# Altium PCB WTDP.PcbDoc
Units mm, origin at the board's own origin, x right, y up, seen from the top; angles counter-clockwise.
Board outline 59 x 42.55 mm, 2 copper layers (Top Layer, Bottom Layer); 37 components, 37 nets, 129 pads, 38 vias.
Unrouted connection lines stored in the file: 2.
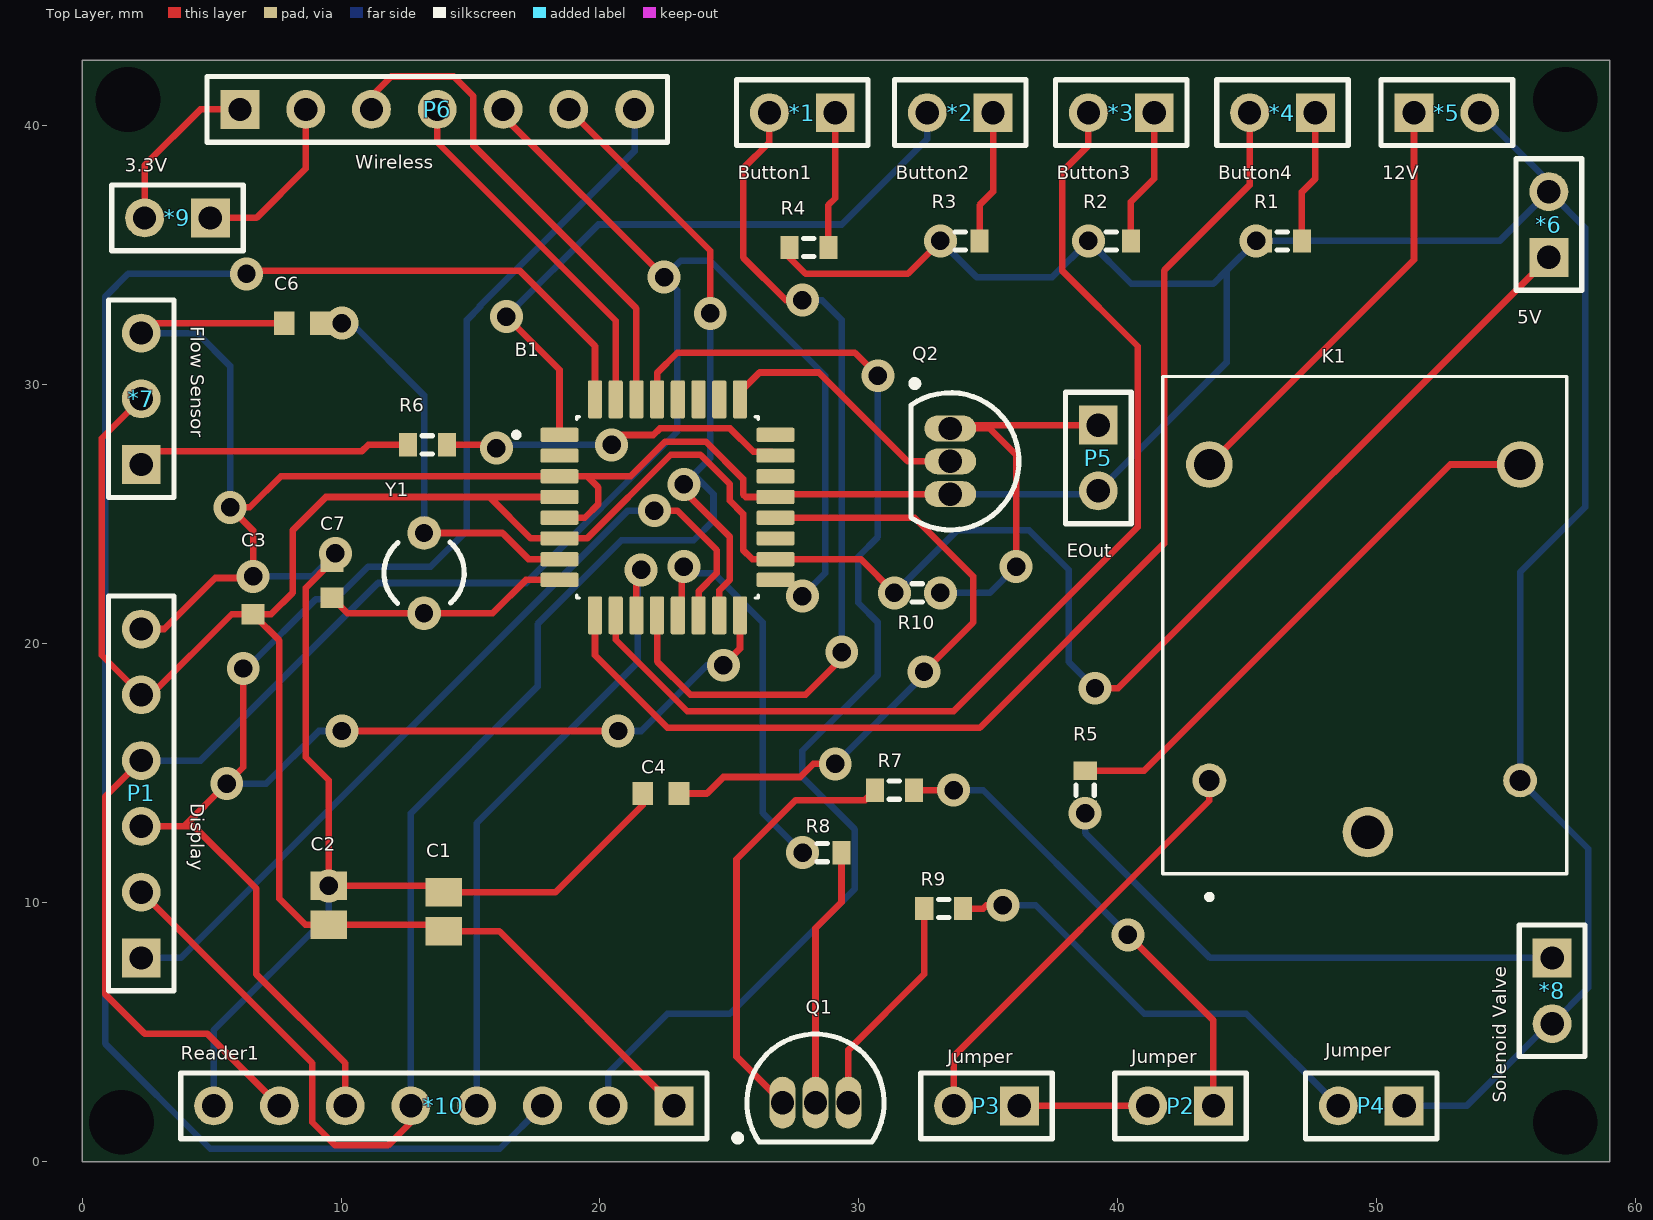
[diagram p0: Top Layer view]
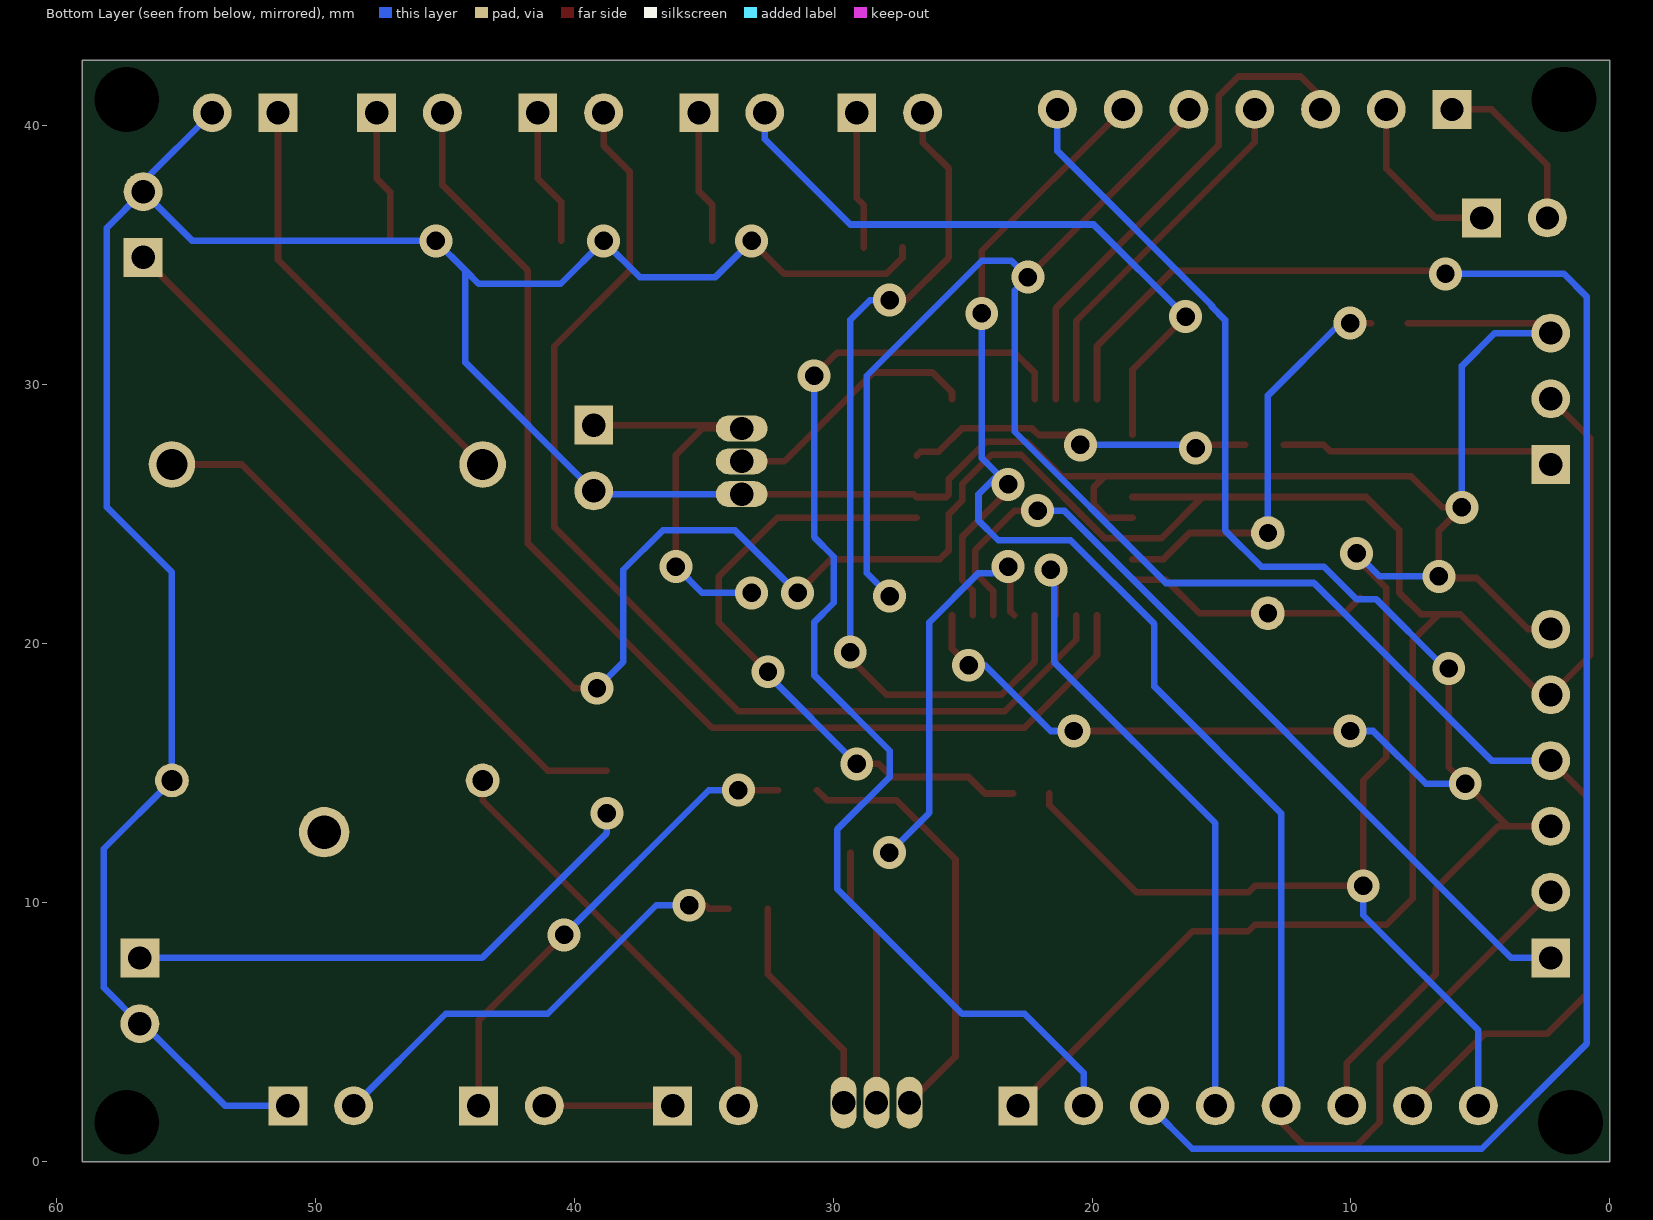
[diagram p1: Bottom Layer view, seen from below]

## Layer stack, top to bottom
Top Solder: solder mask 0.0102, Solder Resist, Dk 3.5
Top Layer: signal copper 0.0356
Dielectric 1: dielectric 0.32, FR-4, Dk 4.8
Bottom Layer: signal copper 0.0356
Bottom Solder: solder mask 0.0102, Solder Resist, Dk 3.5

## Board outline
0,0 0,42.545 59,42.545 59,0

## Design rules (kind name [scope] priority, off if disabled: settings)
Clearance [All] p1: gap=0.254 ignorepadtopadclearanceinfootprint=TRUE except(0: Arc-Hole Track-Hole SMDPad-Hole THPad-Hole Via-Hole Fill-Hole Poly-Hole Region-Hole Text-Hole)
PolygonConnect [All] p1: connectstyle=Relief reliefconductorwidth=0.254 reliefentries=4 polygonreliefangle="90 Angle" airgapwidth=0.254
RoutingVias [All] p1: holewidth=0.711 width=1.27 viastyle="Through Hole" minholewidth=0.711 minwidth=1.27 maxholewidth=0.711 maxwidth=1.27
SolderMaskExpansion [All] p1: expansion=0.102
Width [All] p1: maxlimit=0.254 minlimit=0.254 preferedwidth=0.254
30 further rules are at their usual default settings.

## Components (designator, comment, footprint, x,y, rotation, side; value= is the part's Value field where it differs from the comment)
*1 "Button1" HDR1X2 29.083,40.513 r180 top
*2 "Button2" HDR1X2 35.179,40.513 r180 top
*3 "Button3" HDR1X2 41.402,40.513 r180 top
*4 "Button4" HDR1X2 47.625,40.513 r180 top
*5 "12V" HDR1X2 51.435,40.513 r0 top net-tie
*6 "5V" HDR1X2 56.642,34.925 r90 top
*7 "Flow Sensor" HDR1X3 2.286,26.924 r90 top
*8 "Solenoid Valve" HDR1X2 56.769,7.874 r270 top
*9 "3.3V" HDR1X2 4.953,36.449 r180 top
*10 "Reader1" HDR1X8 22.86,2.159 r180 top
B1 "ATMEGA328P-AU" QFP80P900X900X120-32N 22.606,25.273 r0 top
C1 "Cap Pol3" C0805 13.97,9.652 r90 top value=1uF
C2 "Cap Pol3" C0805 9.525,9.906 r90 top value=1uF
C3 "Cap Semi" 1608[0603] 6.604,21.844 r270 top value=0.1uF
C4 "Cap Semi" 1608[0603] 22.352,14.224 r180 top value=0.1uF
C6 "Cap Semi" 1608[0603] 8.509,32.385 r0 top value=22pF
C7 "Cap Semi" 1608[0603] 9.652,22.479 r270 top value=22pF
K1 "SRD-12VDC-SL-C" RELAY_SRD-12VDC-SL-C 49.53,20.828 r90 top
P1 "Display" HDR1X6 2.286,7.874 r90 top
P2 "Jumper" HDR1X2 43.688,2.159 r180 top
P3 "Jumper" HDR1X2 36.195,2.159 r180 top
P4 "Jumper" HDR1X2 51.054,2.159 r180 top
P5 "EOut" HDR1X2 39.243,28.448 r270 top
P6 "Wireless" HDR1X7 6.096,40.64 r0 top
Q1 "NPN" TO-226-AA 28.321,2.286 r270 top
Q2 "NPN" TO-226-AA 33.528,27.051 r180 top
R1 "Res3" J1-0603 46.355,35.56 r0 top value=1R
R2 "Res3" J1-0603 39.751,35.56 r0 top value=1R
R3 "Res3" J1-0603 33.909,35.56 r0 top value=1R
R4 "Res3" J1-0603 28.067,35.306 r0 top value=1R
R5 "Res3" J1-0603 38.735,14.351 r270 top value=1K
R6 "Res3" J1-0603 13.335,27.686 r180 top value=1R
R7 "Res3" J1-0603 31.369,14.351 r0 top value=0R
R8 "Res3" J1-0603 28.575,11.938 r0 top value=0R
R9 "Res3" J1-0603 33.274,9.779 r180 top value=0R
R10 "Res3" J1-0603 32.258,21.971 r180 top value=1R
Y1 "XTAL" R38 13.208,22.733 r180 top

## Footprints (in the part's own frame and the unit in brackets; to place one, negate y for a bottom-side part, rotate by r counter-clockwise, add the part's x,y. Pads: shape width x height; smd on the part's side, far side on the other; paste and mask are expansions set on the pad)
1608[0603] [mm] "Chip Capacitor, Body 1.6x0.8mm, IPC High Density"
  rect 0.8x0.9 smd: 1(-0.7,0) 2(0.7,0)
  body extent -0.87,-0.48 0.87,0.48, height 1.3
C0805 [mm] "Chip Capacitor, Body 2.0x1.3mm, IPC High Density"
  rect 1.1x1.4 smd: 1(-0.75,0) 2(0.75,0)
  body extent -1.1,-0.72 1.1,0.72, height 1.4
HDR1X2 [mm] "Connector; Header; 2 Position"
  rect 1.5x1.5 hole 0.9: 1(0,0)
  round 1.5 hole 0.9: 2(2.54,0)
  silkscreen extent -1.27,-1.27 3.81,1.27
HDR1X3 [mm] "Connector; Header; 3 Position"
  rect 1.5x1.5 hole 0.9: 1(0,0)
  round 1.5 hole 0.9: 2(2.54,0) 3(5.08,0)
  silkscreen extent -1.27,-1.27 6.35,1.27
HDR1X6 [mm] "Connector; Header; 6 Position"
  rect 1.5x1.5 hole 0.9: 1(0,0)
  round 1.5 hole 0.9: 2(2.54,0) 3(5.08,0) 4(7.62,0) 5(10.16,0) 6(12.7,0)
  silkscreen extent -1.27,-1.27 13.97,1.27
HDR1X7 [mm] "Connector; Header; 7 Position"
  rect 1.5x1.5 hole 0.9: 1(0,0)
  round 1.5 hole 0.9: 2(2.54,0) 3(5.08,0) 4(7.62,0) 5(10.16,0) 6(12.7,0) 7(15.24,0)
  silkscreen extent -1.27,-1.27 16.51,1.27
HDR1X8 [mm] "Connector; Header; 8 Position"
  rect 1.5x1.5 hole 0.9: 1(0,0)
  round 1.5 hole 0.9: 2(2.54,0) 3(5.08,0) 4(7.62,0) 5(10.16,0) 6(12.7,0) 7(15.24,0) 8(17.78,0)
  silkscreen extent -1.27,-1.27 19.05,1.27
J1-0603 [mm] "Chip Resistor, Body 1.6x0.8mm, IPC High Density"
  rect 0.7x0.9 smd: 1(-0.75,0) 2(0.75,0)
  silkscreen extent -0.2,-0.35 0.2,0.35, body extent -0.85,-0.48 0.85,0.48, height 0.9
QFP80P900X900X120-32N [mm]
  rrect25% 1.47x0.55 smd: 1(-4.17,2.8) 2(-4.17,2) 3(-4.17,1.2) 4(-4.17,0.4) 5(-4.17,-0.4) 6(-4.17,-1.2) 7(-4.17,-2) 8(-4.17,-2.8) 17(4.17,-2.8) 18(4.17,-2) 19(4.17,-1.2) 20(4.17,-0.4) 21(4.17,0.4) 22(4.17,1.2) 23(4.17,2) 24(4.17,2.8)
  rrect25% 0.55x1.47 smd: 9(-2.8,-4.17) 10(-2,-4.17) 11(-1.2,-4.17) 12(-0.4,-4.17) 13(0.4,-4.17) 14(1.2,-4.17) 15(2,-4.17) 16(2.8,-4.17) 25(2.8,4.17) 26(2,4.17) 27(1.2,4.17) 28(0.4,4.17) 29(-0.4,4.17) 30(-1.2,4.17) 31(-2,4.17) 32(-2.8,4.17)
  silkscreen extent -5.94,-3.5 3.5,3.5, body extent -4.5,-4.5 4.5,4.5, height 1.2
R38 [mm] "Crystal, Thru-Hole; 2 Leads; Body 3.1 x 8.2 mm (Dia.xH)"
  round 1.3 hole 0.7: 1(0,1.55) 2(0,-1.55)
  silkscreen extent -1.55,-1.19 1.55,1.17
RELAY_SRD-12VDC-SL-C [mm]
  round 1.308 hole 0.8: COIL1(-6.1,6) COIL2(-6.1,-6)
  round 1.95 hole 1.3: COM(-8.1,-0.12)
  round 1.8 hole 1.2: NC(6.1,6) NO(6.1,-6)
  silkscreen extent -10.7,-7.8 9.5,7.8, body extent -9.6,-7.8 9.6,7.8, height 15.8
TO-226-AA [mm] "TO, Flat Index; 3 In-Line, Axial Leads; Body Dia. 4.8mm; Leads 0.55 x 0.51 mm (max)"
  oval 2x1 hole 0.9: 1(0,-1.27) 2(0,0) 3(0,1.27)
  silkscreen extent -2.65,-3.13 1.52,2.65, body extent -2.65,-2.66 1.52,2.66, height 5.33

## Part data
*1 *2 *3 *4 *5 *6 *8 *9: library part "Header 2x1"
*7: library part "Header 1x3"
*10: library part "Header 1x8"
B1: "MICROCHIP - ATMEGA328P-AU. - MICROCONTROLLER MCU, 8 BIT, ATMEGA, 20MHZ, TQFP-32", Manufacturer_Name=Microchip, Mouser Part Number=556-ATMEGA328P-AU, RS Part Number=1310271, Datasheet Link=https://componentsearchengine.com/Datasheets/2/ATMEGA328P-AU.pdf, Geometry.Height=1.2mm, Manufacturer_Part_Number=ATMEGA328P-AU, Mouser Price/Stock=https://www.mouser.com/Search/Refine.aspx?Keyword=556-ATMEGA328P-AU, RS Price/Stock=http://uk.rs-online.com/web/p/products/1310271
C1 C2: "Polarized Capacitor (Surface Mount)", LatestRevisionDate=29-May-2009, LatestRevisionNote="IPC-7351 Footprint Added.", PackageDescription="Chip Capacitor", PackageReference=C0805, Published=8-Jun-2000, Publisher="Altium Limited"
C3 C4 C6 C7: "Capacitor (Semiconductor SIM Model)", LatestRevisionDate=29-May-2009, LatestRevisionNote="IPC-7351 Footprint Added.", PackageDescription="Chip Capacitor", PackageReference=C1206, Published=8-Jun-2000, Publisher="Altium Limited"
K1: "General Purpose Non Latching 12VDC SPDT Through Hole Relays RoHS", Package="NON STANDARD-5 Songle Relay", Check_prices=https://www.snapeda.com/parts/SRD-12VDC-SL-C/Songle+Relay/view-part/?ref=eda, MF="Songle Relay", MP=SRD-12VDC-SL-C, SnapEDA_Link=https://www.snapeda.com/parts/SRD-12VDC-SL-C/Songle+Relay/view-part/?ref=snap
P1: library part "Header 1x6"
P2 P3 P4 P5: library part "Header 2", "Header, 2-Pin", LatestRevisionDate=17-Jul-2002, LatestRevisionNote="Re-released for DXP Platform.", Publisher="Altium Limited"
P6: library part "Header 7", "Header, 7-Pin", LatestRevisionDate=17-Jul-2002, LatestRevisionNote="Re-released for DXP Platform.", Publisher="Altium Limited"
Q1 Q2: "NPN Bipolar Transistor", Code_JEDEC=TO-226-AA, LatestRevisionDate=17-Jul-2002, LatestRevisionNote="Re-released for DXP Platform.", PackageDescription="TO, Flat Index; 3 In-Line, Axial Leads; Body Dia. 4.8mm; Leads 0.55 x 0.51 mm (max)", PackageReference=TO-226-AA, Published=8-Jun-2000, Publisher="Altium Limited"
R1 R2 R3 R4 R5 R6 R7 R8 R9 R10: "Resistor", LatestRevisionDate=29-May-2009, LatestRevisionNote="IPC-7351 Footprint Added.", PackageDescription="Chip Resistor", PackageReference=J1-0603, Published=8-Jun-2000, Publisher="Altium Limited"
Y1: "Crystal Oscillator", LatestRevisionDate=17-Jul-2002, LatestRevisionNote="Re-released for DXP Platform.", PackageDescription="Crystal, Thru-Hole; 2 Leads; Body 3.1 x 8.2 mm (Dia.xH)", PackageReference=R38, Published=8-Jun-2000, Publisher="Altium Limited"

## Free pads (board coordinates)
  round 1.524 hole 2.5: 2(1.778,41.021) 3(57.277,41.021) 4(57.277,1.524) 5(1.524,1.524)

## Via types
v1: diameter 1.27, hole 0.711, Top Layer to Bottom Layer, 38 vias

## Nets (pads, with @x,y where several pads share a name; then routed paths per layer and width w, separated by ;. In a path a pad name is that pad's centre, name@x,y a point inside that pad or via, vN(x,y) a via of type N, cw(c..) or ccw(c..) an arc to the next point about the centre after c; other vN are vias at no path point)
GND: *5.2 *6.2 *7.3 *8.2 *9.2 *10.8 B1.3 B1.5 B1.21 C1.2 C2.2 C3.1 C4.2 C6.1 C7.1 K1.COIL2 P1.6 P4.1 P5.2 P6.1 Q2.3 R1.1 R2.1 R3.1 R4.1 | length 201.1
  Top Layer w0.254: P1.6 3.175,20.574 5.145,22.544 C3.1 v1(6.604,22.606) 6.604,24.384 v1(5.715,25.273) 6.477,25.273 7.677,26.473 B1.3 19.501,26.473 ; *7.3 2.667,32.385 C6.1 ; *9.2 2.413,38.481 4.572,40.64 P6.1 ; C7.1 8.636,22.163 8.636,15.621 9.525,14.732 v1(9.525,10.656) 13.716,10.656 C1.2 18.276,10.402 21.652,13.778 C4.2 ; B1.5 19.412,24.873 19.939,25.4 19.939,26.035 19.501,26.473 ; R4.1 27.317,34.913 27.94,34.29 31.889,34.29 R3.1 ; Q2.3 26.884,25.781 B1.21 25.627,25.673 25.527,25.773 25.527,26.372 24.086,27.813 22.523,27.813 21.183,26.473 19.501,26.473
  Bottom Layer w0.254: *7.3 4.445,32.004 5.715,30.734 v1(5.715,25.273) ; *10.8 5.08,5.08 9.525,9.525 v1(9.525,10.656) ; v1(6.604,22.606) 8.89,22.606 v1(9.779,23.495) ; v1(33.147,35.56) 34.544,34.163 37.465,34.163 v1(38.862,35.56) 40.513,33.909 43.688,33.909 44.196,34.417 ; Q2.3 39.116,25.781 P5.2 44.196,30.861 44.196,34.417 ; P4.1 53.467,2.159 56.642,5.334 *8.2 58.166,6.731 58.166,12.092 K1.COIL2 55.53,22.764 58.039,25.273 58.039,36.068 *6.2 ; *5.2 56.642,37.846 *6.2 ; 44.196,34.417 v1(45.339,35.56) 54.737,35.56 *6.2
Net*1_1: *1.1 R4.2 | length 5.3
  Top Layer w0.254: R4.2 28.817,36.945 29.083,37.211 *1.1
Net*1_2: *1.2 B1.12 | length 34.4
  Top Layer w0.254: B1.12 22.206,19.323 23.495,18.034 27.94,18.034 29.337,19.431 v1(29.337,19.685) ; *1.2 26.543,39.37 25.527,38.354 25.527,34.925 27.178,33.274 v1(27.813,33.274)
  Bottom Layer w0.254: v1@27.305,33.274 v1(27.813,33.274) 28.575,33.274 29.337,32.512 v1(29.337,19.685)
Net*2_1: *2.1 R3.2 | length 5.2
  Top Layer w0.254: R3.2 34.659,36.945 35.179,37.465 *2.1
Net*2_2: *2.2 B1.1 | length 25.5
  Top Layer w0.254: v1(16.383,32.639) 18.436,30.586 B1.1
  Bottom Layer w0.254: v1(16.383,32.639) 19.939,36.195 29.337,36.195 32.639,39.497 *2.2
Net*3_1: *3.1 R2.2 | length 5.3
  Top Layer w0.254: R2.2 40.501,37.072 41.402,37.973 *3.1
Net*3_2: *3.2 B1.10 | length 42.8
  Top Layer w0.254: B1.10 20.606,20.161 23.368,17.399 33.655,17.399 40.767,24.511 40.767,31.496 37.846,34.417 37.846,38.227 38.862,39.243 *3.2
Net*4_1: *4.1 R1.2 | length 5.2
  Top Layer w0.254: R1.2 47.105,37.453 47.625,37.973 *4.1
Net*4_2: *4.2 B1.9 | length 45.6
  Top Layer w0.254: B1.9 19.806,19.564 22.606,16.764 34.671,16.764 41.783,23.876 41.783,34.417 45.085,37.719 *4.2
Net*5_1: *5.1 K1.NC | length 16.9
  Top Layer w0.254: K1.NC 51.435,34.833 *5.1
Net*6_1: *6.1 *7.2 *10.1 B1.4 B1.6 B1.18 C1.1 C2.1 C3.2 P1.5 P2.2 P3.1 R10.2 | length 127.1
  Top Layer w0.254: *7.2 0.762,27.94 0.762,19.558 P1.5 2.667,18.034 5.777,21.144 C3.2 ; B1.4 15.729,25.673 ; *10.1 16.117,8.902 C1.1 13.716,9.156 C2.1 8.624,9.156 7.62,10.16 7.62,20.128 C3.2 ; v1(31.369,21.971) 30.067,23.273 B1.18 25.876,23.273 25.527,23.622 25.527,25.019 25.019,25.527 25.019,26.162 23.876,27.305 22.733,27.305 19.501,24.073 B1.6 17.329,24.073 15.729,25.673 ; P3.1 P2.2 ; v1(39.116,18.288) 40.005,18.288 *6.1 ; C3.2 7.301,21.144 8.128,21.971 8.128,24.384 9.417,25.673 15.729,25.673
  Bottom Layer w0.254: v1(31.369,21.971) 33.782,24.384 36.576,24.384 38.1,22.86 38.1,19.304 v1(39.116,18.288)
Net*7_1: *7.1 R6.2 | length 10.6
  Top Layer w0.254: *7.1 2.794,27.432 10.795,27.432 11.049,27.686 R6.2
Net*8_1: *8.1 R5.2 | length 20.8
  Bottom Layer w0.254: v1(38.735,13.462) 38.735,12.7 43.561,7.874 *8.1
Net*9_1: *9.1 P6.2 | length 6.8
  Top Layer w0.254: *9.1 6.731,36.449 8.636,38.354 P6.2
Net*10_2: *10.2 B1.29 | length 46.7
  Top Layer w0.254: B1.29 22.206,30.461 22.987,31.242 29.845,31.242 v1(30.734,30.353) v1@30.861,30.226
  Bottom Layer w0.254: *10.2 20.32,3.429 22.606,5.715 25.019,5.715 29.845,10.541 29.845,12.827 27.813,14.859 27.813,15.875 30.734,18.796 30.734,20.828 29.972,21.59 29.972,23.368 30.734,24.13 v1(30.734,30.353)
Net*10_3: *10.3 B1.32 | length 70.4
  Top Layer w0.254: v1@6.604,34.417 16.891,34.417 19.806,31.502 B1.32
  Bottom Layer w0.254: v1(6.35,34.29) 1.778,34.29 0.889,33.401 0.889,4.572 4.953,0.508 16.129,0.508 *10.3
Net*10_4: *10.4 B1.11 | length 24.6
  Top Layer w0.254: B1.11 21.406,22.676 v1(21.59,22.86)
  Bottom Layer w0.254: *10.4 15.24,13.081 21.463,19.304 v1@21.463,22.352
Net*10_5: *10.5 B1.15 P1.2 P6.6 | length 71
  Top Layer w0.254: P1.2 8.89,3.81 8.89,1.524 9.779,0.635 11.811,0.635 12.7,1.524 *10.5 ; P6.6 24.257,35.179 v1(24.257,32.766) v1@24.257,32.385 ; v1(23.241,26.162) 23.241,25.908 25.019,24.13 25.019,22.479 24.606,22.066 B1.15
  Bottom Layer w0.254: *10.5 12.7,13.462 17.59,18.351 17.59,20.764 20.828,24.003 23.622,24.003 24.384,24.765 24.384,25.781 23.622,26.543 24.257,27.178 v1(24.257,32.766)
Net*10_6: *10.6 B1.16 P1.3 P6.7 | length 75.2
  Top Layer w0.254: P1.3 3.937,12.954 ; v1(6.223,19.05) 6.223,15.24 v1(5.588,14.605) 3.937,12.954 ; v1(10.033,16.637) v1(20.701,16.637) v1@20.828,16.637 ; *10.6 10.16,3.81 6.731,7.239 6.731,10.541 4.318,12.954 3.937,12.954 ; v1(24.765,19.177) 25.406,19.818 B1.16
  Bottom Layer w0.254: v1(5.588,14.605) 7.112,14.605 9.144,16.637 v1(10.033,16.637) ; v1@6.477,19.177 9.017,21.717 9.779,21.717 11.049,22.987 13.462,22.987 14.859,24.384 14.859,32.512 15.367,33.02 15.367,33.06 21.336,39.029 P6.7 ; v1(20.701,16.637) 21.59,16.637 24.13,19.177 v1(24.765,19.177)
Net*10_7: *10.7 B1.17 P1.4 P6.5 | length 76.5
  Top Layer w0.254: P1.4 0.889,14.097 0.889,6.477 2.413,4.953 4.826,4.953 *10.7 ; P6.5 16.256,40.386 v1(22.479,34.163)
  Bottom Layer w0.254: P1.4 4.572,15.494 11.43,22.352 17.145,22.352 22.987,28.194 22.987,33.655 v1(22.479,34.163) 23.114,34.798 24.257,34.798 28.702,30.353 28.702,22.733 v1(27.813,21.844)
NetB1_7: B1.7 C6.2 Y1.2 | length 15.7
  Top Layer w0.254: C6.2 v1(10.033,32.385) ; Y1.2 16.23,24.283 17.24,23.273 B1.7
  Bottom Layer w0.254: v1@10.414,32.385 13.208,29.591 Y1.2
NetB1_8: B1.8 C7.2 Y1.1 | length 9.6
  Top Layer w0.254: C7.2 10.248,21.183 Y1.1 15.849,21.183 17.139,22.473 B1.8
NetB1_13: B1.13 R8.1 | length 16
  Top Layer w0.254: B1.13 23.15,21.247 23.15,22.896 v1(23.241,22.987)
  Bottom Layer w0.254: v1(23.241,22.987) 22.987,22.733 24.384,22.733 26.289,20.828 26.289,13.474 v1(27.825,11.938)
NetB1_14: B1.14 P1.1 | length 32.8
  Top Layer w0.254: v1(22.098,25.146) 22.987,25.146 24.511,23.622 24.511,22.733 23.806,22.028 B1.14
  Bottom Layer w0.254: P1.1 3.81,7.874 21.082,25.146 v1(22.098,25.146)
NetB1_20: B1.20 C4.1 | length 25.2
  Top Layer w0.254: C4.1 24.13,14.224 24.765,14.859 27.73,14.859 28.238,15.367 v1(29.083,15.367) ; B1.20 32.15,24.873 34.417,22.606 34.417,20.828 v1(32.512,18.923) v1@32.385,18.796
  Bottom Layer w0.254: v1(29.083,15.367) 32.512,18.796 v1(32.512,18.923) v1@32.512,19.431
NetB1_23: B1.23 R6.1 | length 13.2
  Top Layer w0.254: R6.1 15.875,27.686 v1(16.002,27.559) ; v1@20.32,28.067 22.058,28.067 22.312,28.321 25.019,28.321 25.923,27.417 26.632,27.417 B1.23
  Bottom Layer w0.254: v1@16.256,27.686 v1(20.447,27.686)
NetB1_25: B1.25 Q2.2 | length 10.1
  Top Layer w0.254: B1.25 25.406,29.724 26.162,30.48 28.448,30.48 31.877,27.051 Q2.2
NetB1_30: B1.30 P6.3 | length 19.4
  Top Layer w0.254: P6.3 11.176,41.148 11.938,41.91 14.351,41.91 15.113,41.148 15.113,39.243 21.406,32.95 B1.30
NetB1_31: B1.31 P6.4 | length 14.1
  Top Layer w0.254: P6.4 13.716,39.37 20.606,32.48 B1.31
NetK1_COIL1: K1.COIL1 P3.2 | length 16.7
  Top Layer w0.254: P3.2 33.655,4.064 43.53,13.939 K1.COIL1
NetK1_NO: K1.NO R5.1 | length 21.7
  Top Layer w0.254: R5.1 41.009,15.101 52.836,26.928 K1.NO
NetP2_1: P2.1 R7.2 | length 18.6
  Top Layer w0.254: R7.2 v1(33.655,14.351) ; v1(40.386,8.763) 43.688,5.461 P2.1
  Bottom Layer w0.254: v1(33.655,14.351) 34.798,14.351 v1(40.386,8.763)
NetP4_2: P4.2 R9.1 | length 17.8
  Top Layer w0.254: R9.1 34.798,9.779 34.925,9.906 v1(35.56,9.906)
  Bottom Layer w0.254: v1(35.56,9.906) 36.83,9.906 41.021,5.715 44.958,5.715 P4.2
NetP5_1: P5.1 Q2.1 R10.1 | length 16.4
  Top Layer w0.254: v1(36.068,22.987) 36.068,27.305 35.052,28.321 Q2.1 33.655,28.448 P5.1
  Bottom Layer w0.254: v1(33.147,21.971) 35.052,21.971 v1(36.068,22.987)
NetQ1_1: Q1.1 R7.1 | length 16.6
  Top Layer w0.254: Q1.1 25.273,4.064 25.273,11.684 27.559,13.97 30.238,13.97 R7.1
NetQ1_2: Q1.2 R8.2 | length 10.1
  Top Layer w0.254: Q1.2 28.321,9.017 29.325,10.021 R8.2
NetQ1_3: Q1.3 R9.2 | length 8.7
  Top Layer w0.254: Q1.3 29.591,4.318 32.524,7.251 R9.2
pads on no net: B1.2 B1.19 B1.22 B1.24 B1.26 B1.27 B1.28 K1.COM

## Silkscreen, mask and mechanical layers (free items; w line width, h text height)
Mechanical 1:
  lines w0.254: 0.067,-1.524 0.067,-1.016 ; 1.591,-1.778 0.067,-1.27 ; 1.591,-0.762 0.067,-1.27 ; 24.463,-1.27 0.067,-1.27 ; 34.671,-1.27 59.067,-1.27 ; 57.543,-1.778 59.067,-1.27 ; 57.543,-0.762 59.067,-1.27 ; 59.067,-1.524 59.067,-1.016 ; 59.69,1.651 60.198,0.127 ; 59.69,40.894 60.198,42.418 ; 59.944,0.127 60.452,0.127 ; 59.944,42.418 60.452,42.418 ; 60.198,13.376 60.198,0.127 ; 60.198,29.169 60.198,42.418 ; 60.706,1.651 60.198,0.127 ; 60.706,40.894 60.198,42.418 ; 0,0 59,0 59,42.545 0,42.545 0,0
  text "42.291 (mm)" at 61.112,13.63 h1.52 r90
  text "59 (mm)" at 24.717,-2.184 h1.52